# Altium PCB PCB_PLC.PcbDoc
Units mil, origin at the board's own origin, x right, y up, seen from the top; angles counter-clockwise.
Board outline 2559.06 x 3287.4 mil, 2 copper layers (Top Layer, Bottom Layer); 98 components, 70 nets, 312 pads, 24 vias.
Unrouted connection lines stored in the file: 207.
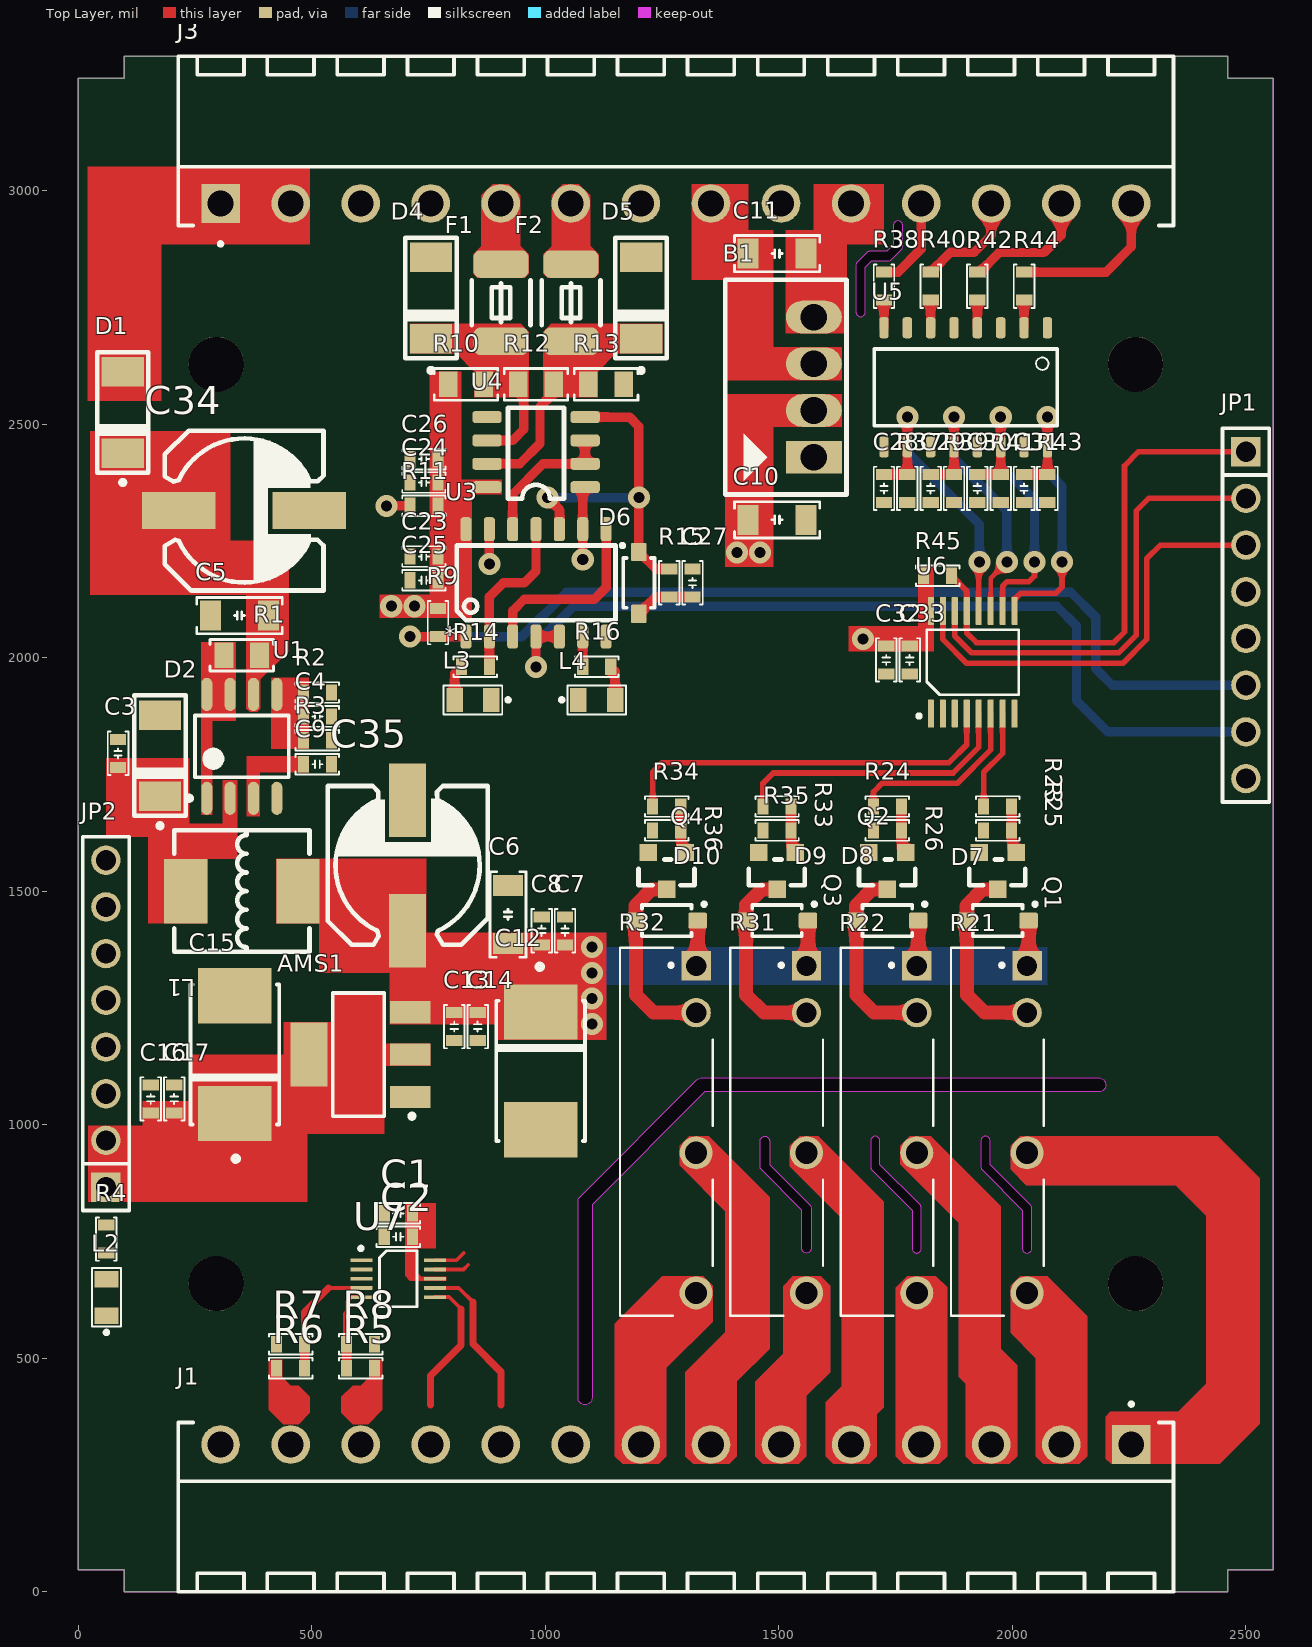
[diagram p0: Top Layer view]
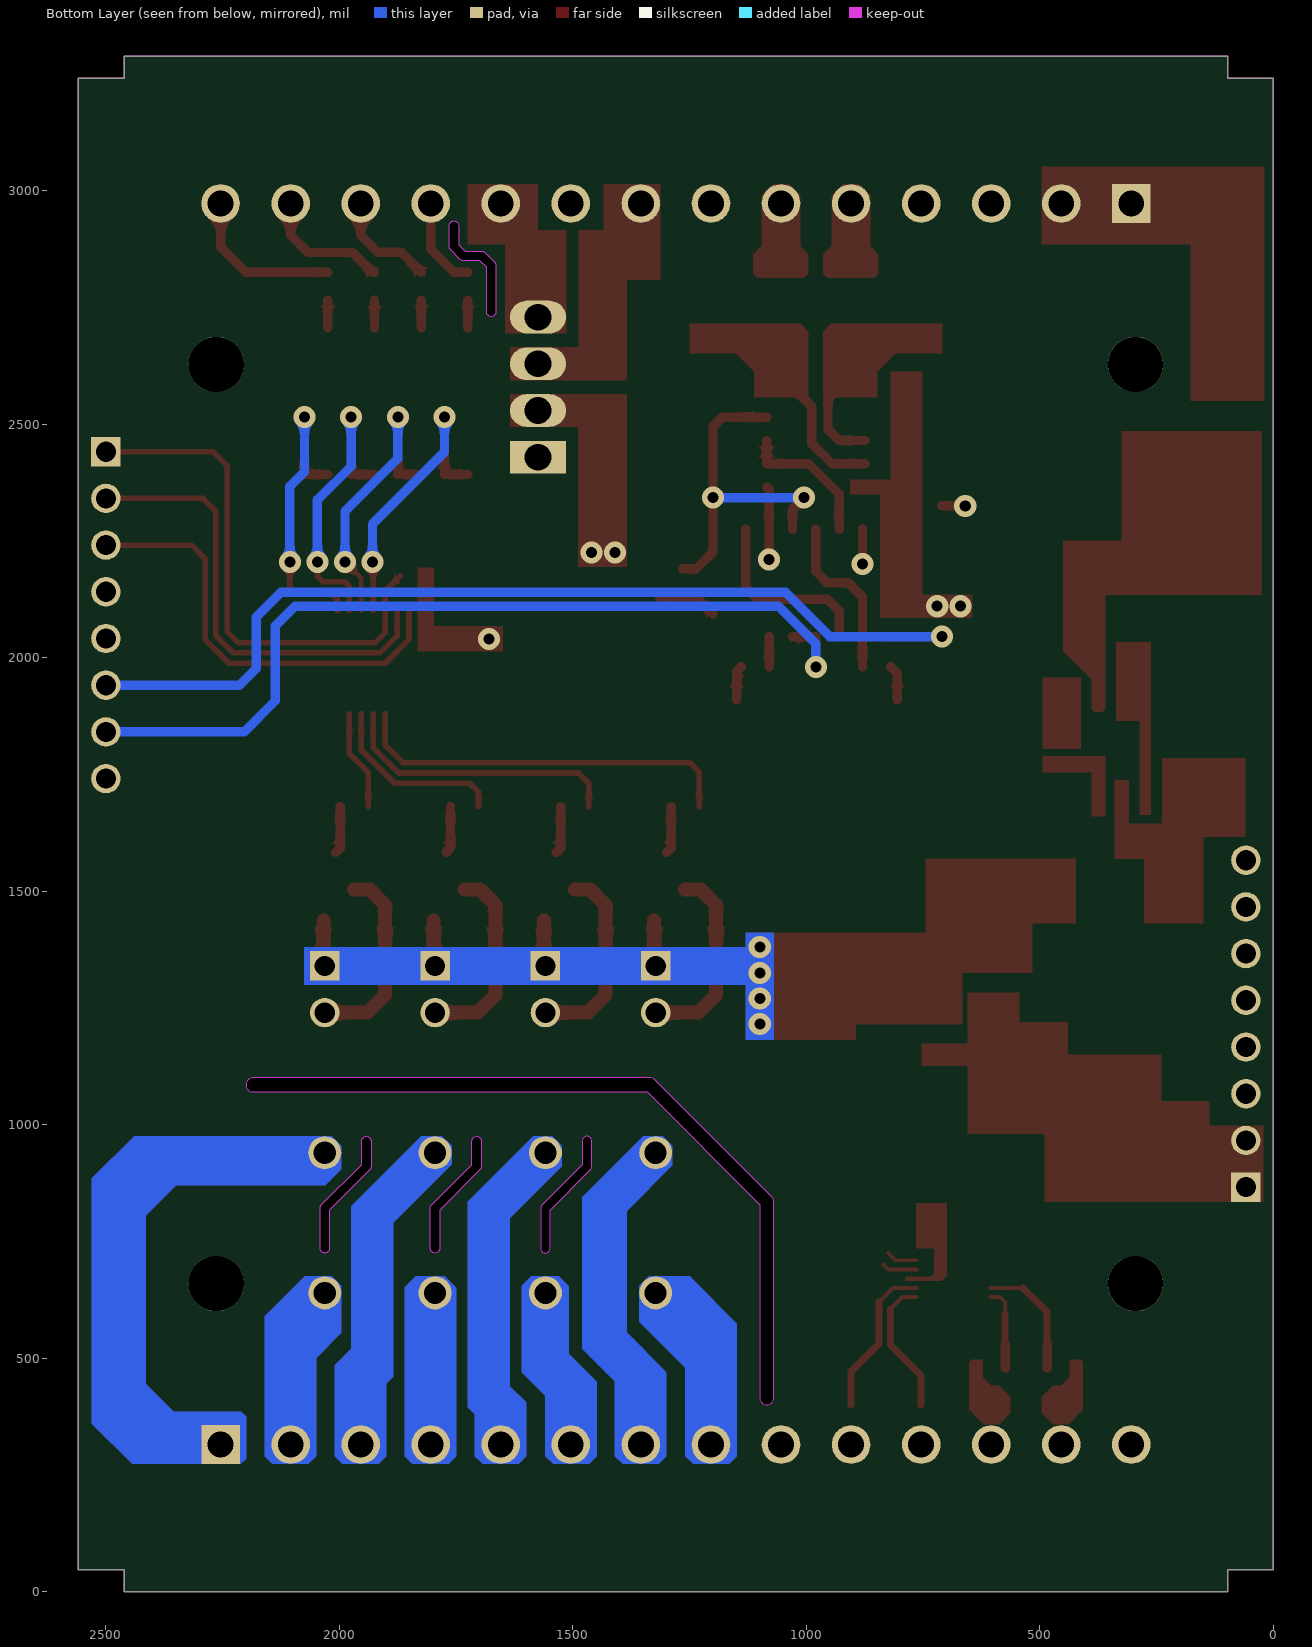
[diagram p1: Bottom Layer view, seen from below]
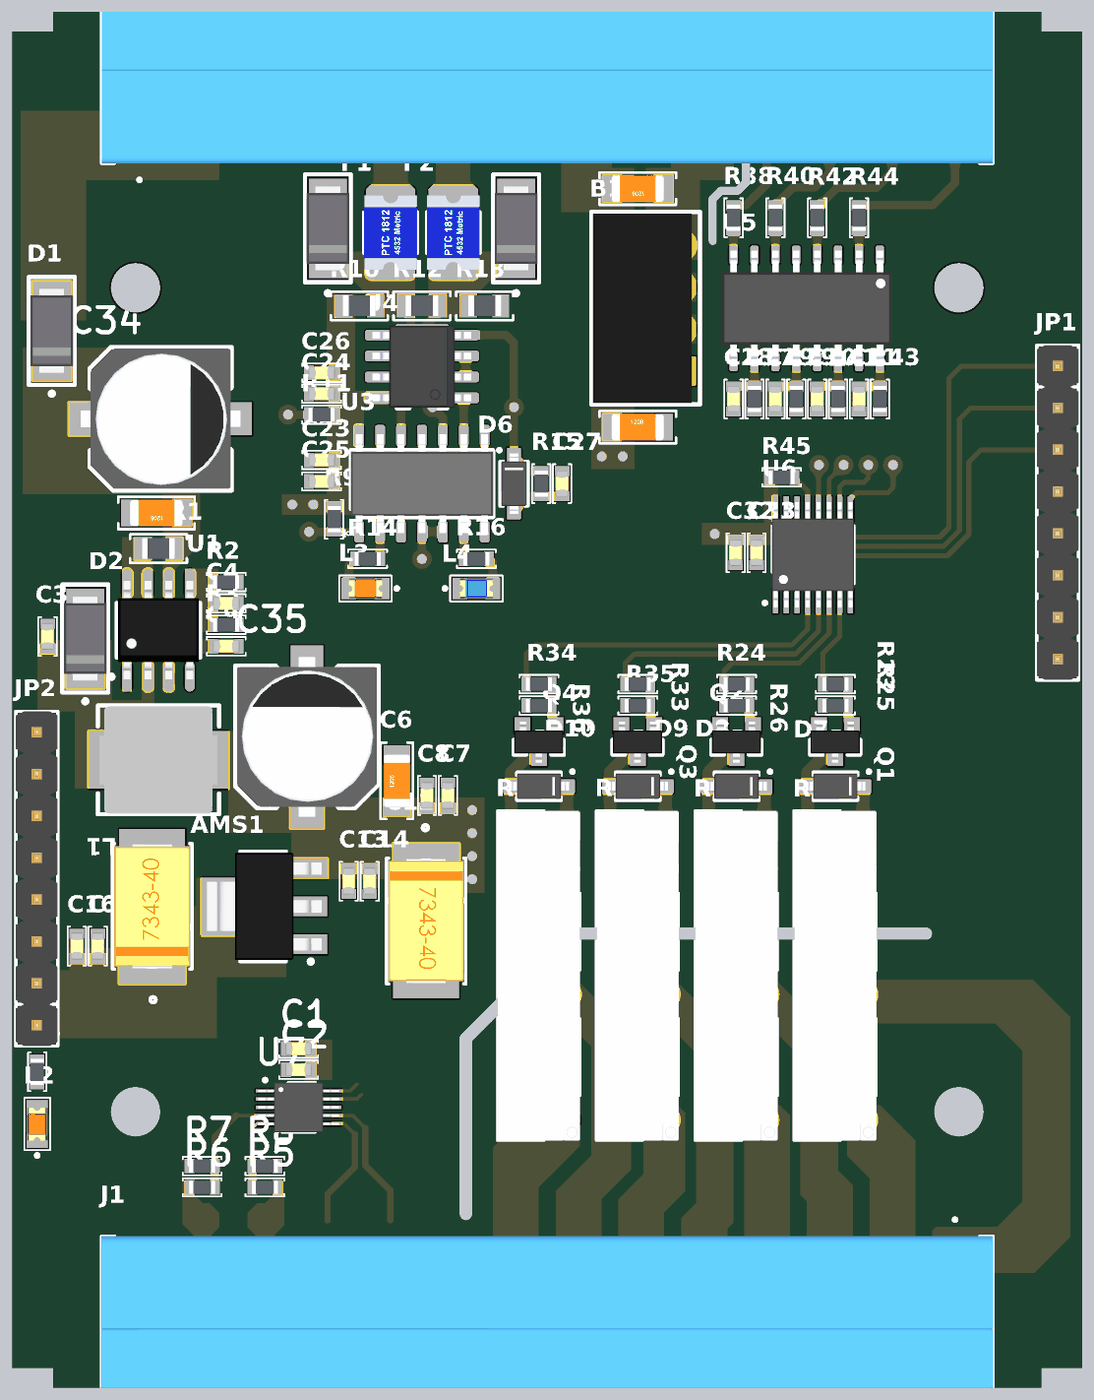
[diagram p2: 3D render of the assembled board from above, using the file's embedded part models]

## Layer stack, top to bottom
Top Solder: solder mask 0.4, Solder Resist, Dk 3.5
Top Layer: signal copper 1.4
Dielectric 1: dielectric 12.6, FR-4, Dk 4.8
Bottom Layer: signal copper 1.4
Bottom Solder: solder mask 0.4, Solder Resist, Dk 3.5

## Board outline
0,47.24 0,3240.16 98.43,3240.16 98.43,3287.4 2460.63,3287.4 2460.63,3240.16 2559.06,3240.16 2559.06,47.24 2460.63,47.24 2460.63,0 98.43,0 98.43,47.24
cut-out: 1664.98,2740 ccw(c1675,2740) 1685.02,2740 1685.02,2835.85 1699.15,2849.98 1735,2849.98 ccw(c1735,2860) 1742.08,2852.92 1762.08,2872.92 ccw(c1755,2880) 1765.02,2880 1765.02,2925 ccw(c1755,2925) 1744.98,2925 1744.98,2884.15 1730.85,2870.01 1695,2870.01 ccw(c1695,2860) 1687.92,2867.08 1667.92,2847.08 ccw(c1675,2840) 1664.98,2840
cut-out: 1069.98,415 1069.98,835 cw(c1085,835) 1074.4,845.63 1074.38,845.62 1324.38,1095.62 1324.37,1095.6 cw(c1335,1085) 1335,1100.01 2185,1100.01 cw(c2185,1085) 2200.02,1085 cw(c2185,1085) 2185,1069.98 1341.22,1069.98 1100.02,828.78 1100.02,415 cw(c1085,415)
cut-out: 1935.36,902.92 2021.48,816.8 2021.48,735 ccw(c2031.5,735) 2041.51,735 2041.51,820.94 ccw(c2031.5,820.94) 2038.58,828.03 1952.46,914.15 1952.46,965 ccw(c1942.44,965) 1932.43,965 1932.43,910 ccw(c1942.44,910)
cut-out: 1699.14,902.92 1785.26,816.8 1785.26,735 ccw(c1795.28,735) 1805.29,735 1805.29,820.94 ccw(c1795.28,820.94) 1802.36,828.03 1716.24,914.15 1716.24,965 ccw(c1706.22,965) 1696.21,965 1696.21,910 ccw(c1706.22,910)
cut-out: 1462.92,902.92 cw(c1470,910) 1459.98,910 1459.98,965 cw(c1470,965) 1480.02,965 1480.02,914.15 1566.14,828.03 cw(c1559.06,820.94) 1569.07,820.94 1569.07,735 cw(c1559.06,735) 1549.04,735 1549.04,816.8

## Design rules (kind name [scope] priority, off if disabled: settings)
Clearance [All] p1: gap=10 ignorepadtopadclearanceinfootprint=FALSE except(0: Arc-Hole Track-Hole SMDPad-Hole THPad-Hole Via-Hole Fill-Hole Poly-Hole Region-Hole Text-Hole)
PolygonConnect [All] p1: connectstyle=Relief reliefconductorwidth=10 reliefentries=4 polygonreliefangle="90 Angle" airgapwidth=10
RoutingVias [All] p1: holewidth=23.62 width=47.24 viastyle="Through Hole" minholewidth=23.62 minwidth=47.24 maxholewidth=23.62 maxwidth=47.24
SilkToSilkClearance [All] p1: silktosilkclearance=4
SilkToSolderMaskClearance [IsPad] p1: minsilkscreentomaskgap=4 clearancetoexposedcopper=TRUE
SolderMaskExpansion [All] p1: expansion=4 istentingtop=FALSE
Width [All] p1: maxlimit=100 minlimit=8 preferedwidth=10
28 further rules are at their usual default settings.

## Classes and differential pairs
component class U_RS485: C23 C24 C25 C26 C27 D4 D5 D6 F1 F2 L3 L4 R9 R10 R11 R12 R13 R14 R15 R16 U3 U4
component class U_Relay: D7 D8 D9 D10 Q1 Q2 Q3 Q4 R21 R22 R23 R24 R25 R26 R31 R32 R33 R34 R35 R36
component class U_Power: AMS1 B1 C3 C4 C5 C6 C7 C8 C9 C10 C11 C12 C13 C14 C15 C16 C17 C34 C35 D1 D2 L1 L2 R1 R2 R3 R4 U1
component class U_Input: C28 C29 C30 C31 R37 R38 R39 R40 R41 R42 R43 R44 U5
component class Top: C1 C2 C32 C33 J1 J3 JP1 JP2 R5 R6 R7 R8 R45 U6 U7

## Components (designator, comment, footprint, x,y, rotation, side; value= is the part's Value field where it differs from the comment)
AMS1 "AMS1117-3.3V" SOT223 600,1150 r90 top value="AMS1117-3.3V SOT223"
B1 "B0505S" B0505S 1574.8,2429.13 r90 top
C1 "1uF" "CAP 0603" 685,810 r180 top
C2 "0.1uF" "CAP 0603" 685,760 r180 top
C3 "470pF" "CAP 0603" 85,1795 r90 top
C4 "100pF" "CAP 0603" 511.81,1874.02 r180 top
C5 "10uF" "CAP 1206" 345,2090 r180 top
C6 "10uF" "CAP 1206" 920,1450 r90 top
C7 "1uF" "CAP 0603" 1042,1415 r90 top
C8 "0.1uF" "CAP 0603" 992,1415 r90 top
C9 "470pF" "CAP 0603" 511.81,1771.65 r0 top
C10 "10uF" "CAP 1206" 1496.06,2295 r0 top
C11 "10uF" "CAP 1206" 1496.06,2865 r180 top
C12 "100uF" "TU TANTALUM SMD7343" 990,1115 r270 top
C13 "1uF" "CAP 0603" 805,1210 r270 top
C14 "0.1uF" "CAP 0603" 855,1210 r270 top
C15 "100uF" "TU TANTALUM SMD7343" 335,1150 r90 top
C16 "1uF" "CAP 0603" 155,1055 r90 top
C17 "0.1uF" "CAP 0603" 205,1055 r90 top
C23 "1uF" "CAP 0603" 740,2216.54 r180 top
C24 "1uF" "CAP 0603" 740,2375 r180 top
C25 "0.1uF" "CAP 0603" 740,2165.35 r180 top
C26 "0.1uF" "CAP 0603" 740,2425 r180 top
C27 "33pF" "CAP 0603" 1315,2160 r270 top
C28 "0.1uF" "CAP 0603" 1725,2362.2 r270 top
C29 "0.1uF" "CAP 0603" 1825,2362.2 r270 top
C30 "0.1uF" "CAP 0603" 1925,2362.2 r270 top
C31 "0.1uF" "CAP 0603" 2025,2362.2 r270 top
C32 "1uF" "CAP 0603" 1730,1995 r270 top
C33 "0.1uF" "CAP 0603" 1780,1995 r270 top
C34 "470uF" "TU NHOM 8 (F)" 355,2315 r0 top
C35 "470uF" "TU NHOM 8 (F)" 705,1555 r90 top
D1 "SS34" "DIODE SMA" 95,2525 r270 top
D2 "SS34" "DIODE SMA" 175,1790 r270 top
D4 "SMAJ18A" DO-214AC,SMA 755,2770 r270 top
D5 "SMAJ18A" DO-214AC,SMA 1205,2770 r270 top
D6 "MBR0520" SOD-123 1200,2160 r90 top value=FR307
D7 "Didode_SMD" SOD-123 1968.5,1437.01 r0 top value=FR307
D8 "Didode_SMD" SOD-123 1732.28,1437.01 r0 top value=FR307
D9 "Didode_SMD" SOD-123 1496.06,1437.01 r0 top value=FR307
D10 "Didode_SMD" SOD-123 1259.84,1437.01 r0 top value=FR307
F1 "MSMF050" FUSE_PTC 905,2760 r90 top
F2 "MSMF050" FUSE_PTC 1055,2760 r90 top
J1 "CON 14 EDGR 3.81 RA" "CON 14 EDGR 3.81 RA" 1279.53,314.96 r180 top locked
J3 "CON 14 EDGR 3.81 RA" "CON 14 EDGR 3.81 RA" 1279.53,2972.44 r0 top locked
JP1 "JP 1x8 2.54" "JP 1x8 DT" 2500,2440.94 r270 top locked
JP2 "JP 1x8 2.54" "JP 1x8 DT" 59.06,866.14 r90 top locked
L1 "100uH/0630" INDUCTOR_0630SMD 350,1500 r90 top
L2 "LED 0805" LED-0805-RED 60,630 r270 top
L3 "LED 0805" LED-0805-RED 845,1909.45 r0 top
L4 "LED 0805" LED-0805-BLUE 1110,1909.45 r180 top
Q1 "2SC1815" SOT23 1968.5,1543.31 r180 top
Q2 "2SC1815" SOT23 1732.28,1543.31 r180 top
Q3 "2SC1815" SOT23 1496.06,1543.31 r180 top
Q4 "2SC1815" SOT23 1259.84,1543.31 r180 top
R1 "0.03" "RES 0805" 350,2005 r0 top
R2 "4.7k" "RES 0603" 511.81,1925.2 r0 top
R3 "1.5k" "RES 0603" 511.81,1822.83 r180 top
R4 "2.2k" "RES 0603" 60,755 r90 top
R5 "RS1" "RES 0603" 604.53,478.7 r0 top
R6 "RS1" "RES 0603" 454.53,478.7 r180 top
R7 "RS2" "RES 0603" 454.53,529.88 r180 top
R8 "RS2" "RES 0603" 604.53,529.88 r0 top
R9 "4.7k" "RES 0603" 770,2075 r90 top
R10 "560" "RES 0805" 830,2585 r180 top
R11 "4.7k" "RES 0603" 740,2325 r0 top
R12 "120" "RES 0805" 980,2585 r180 top
R13 "560" "RES 0805" 1130,2585 r180 top
R14 "2.2k" "RES 0603" 850,1980.31 r0 top
R15 "5.6k" "RES 0603" 1265,2160 r270 top
R16 "2.2k" "RES 0603" 1110,1980.31 r180 top
R21 "HF49FD/005" RELAY_HF49FD/005-1H12T 1968.5,984.25 r270 top locked
R22 "HF49FD/005" RELAY_HF49FD/005-1H12T 1732.28,984.25 r270 top locked
R23 "2.2k" "RES 0603" 1968.5,1681.1 r0 top
R24 "2.2k" "RES 0603" 1732.28,1681.1 r0 top
R25 "10k" "RES 0603" 1968.5,1629.92 r0 top
R26 "10k" "RES 0603" 1732.28,1629.92 r0 top
R31 "HF49FD/005" RELAY_HF49FD/005-1H12T 1496.06,984.25 r270 top locked
R32 "HF49FD/005" RELAY_HF49FD/005-1H12T 1259.84,984.25 r270 top locked
R33 "2.2k" "RES 0603" 1496.06,1681.1 r0 top
R34 "2.2k" "RES 0603" 1259.84,1681.1 r0 top
R35 "10k" "RES 0603" 1496.06,1629.92 r0 top
R36 "10k" "RES 0603" 1259.84,1629.92 r0 top
R37 "10k" "RES 0603" 1775,2362.2 r90 top
R38 "2.2k" "RES 0603" 1725,2795.28 r90 top
R39 "10k" "RES 0603" 1875,2362.2 r90 top
R40 "2.2k" "RES 0603" 1825,2795.28 r90 top
R41 "10k" "RES 0603" 1975,2362.2 r90 top
R42 "2.2k" "RES 0603" 1925,2795.28 r90 top
R43 "10k" "RES 0603" 2075,2362.2 r90 top
R44 "2.2k" "RES 0603" 2025,2795.28 r90 top
R45 "2.2k" "RES 0603" 1840,2175 r180 top
U1 "MC34063ABD-TR" "SOP 8" 350,1810 r90 top
U3 "74HC04D" SOIC14_50_285_80X25_SMT 980,2160 r90 top
U4 "SP3485" SOIC8_50_328_25X90_SMT 980,2440 r180 top
U5 "TLP291-4" SOP16_TLP2XX 1900,2578.74 r270 top
U6 "TCA9534APWR" SOP65P640X120-16N 1915,1990 r90 top
U7 "ADS1115IDGSR" SOP50P490X110-10N 685,670 r0 top

## Footprints (in the part's own frame and the unit in brackets; to place one, negate y for a bottom-side part, rotate by r counter-clockwise, add the part's x,y. Pads: shape width x height; smd on the part's side, far side on the other; paste and mask are expansions set on the pad)
B0505S [mil]
  rect 70x120 hole 57: 1(0,0)
  oval 70x120 hole 57: 2(100,0) 3(200,0) 4(300,0)
  silkscreen extent -80,-70 380,190, body extent -76,-50 376,186, height 394
"CAP 0603" [mm]
  rect 0.6x0.89 smd mask+0.051: 1(-0.762,0) 2(0.762,0)
  silkscreen extent -1.18,-0.56 1.18,0.56, body extent -0.8,-0.4 0.8,0.4, height 0.78
"CAP 1206" [mil]
  rect 45x64 smd mask+2: 1(-62,0) 2(62,0)
  silkscreen extent -91,-39 91,39, body extent -63,-31 63,32, height 40
"CON 14 EDGR 3.81 RA" [mm]
  rect 2.1x2.1 / inner round 2.1 / far side rect 2.1x2.1 hole 1.4: 1(-24.765,0)
  round 2.1 hole 1.4: 2(-20.955,0) 3(-17.145,0) 4(-13.335,0) 5(-9.525,0) 6(-5.715,0) 7(-1.905,0) 8(1.905,0) 9(5.715,0) 10(9.525,0) 11(13.335,0) 12(17.145,0) 13(20.955,0) 14(24.765,0)
  silkscreen extent -27.07,-2.3 27.07,8, body extent -27.06,-1.2 27.07,8, height 7.4
"DIODE SMA" [mil] "SMA"
  rect 62.99x90.55 smd: 1(-87,0) 2(87,0)
  silkscreen extent -129,-55 155,55, body extent -102,-51 102,51, height 95
DO-214AC,SMA [mil] "Didode [1N4007,SS14,...]"
  rect 62.99x90.55 smd: 1(-87,0) 2(87,0)
  silkscreen extent -129,-55 160,55, body extent -102,-51 102,51, height 95
FUSE_PTC [mm]
  rrect50% 1.5x3 smd: 1(-2.1,0) 2(2.1,0)
  silkscreen extent -1.24,-1.6 1.23,1.6, body extent -2.25,-1.6 2.25,1.6, height 0.55
INDUCTOR_0630SMD [mm] "10uH"
  rect 3.5x2.35 smd: 1(0,3.048) 2(0,-3.048)
  silkscreen extent -3.3,-3.68 3.3,3.68, body extent -3.25,-3.59 3.25,3.59, height 3.97
"JP 1x8 DT" [mm] "8 pins, 1 row, straight, gold plating"
  rect 1.6x1.6 hole 1.1: 1(0,0)
  round 1.6 hole 1.1: 2(2.54,0) 3(5.08,0) 4(7.62,0) 5(10.16,0) 6(12.7,0) 7(15.24,0) 8(17.78,0)
  silkscreen extent -1.27,-1.27 19.05,1.27, body extent -1.27,-1.27 19.05,1.27, height 8.54
LED-0805-BLUE [mm]
  rect 0.9x1.3 smd mask+0.051: 1(-1,0) 2(1,0)
  silkscreen extent -1.6,-0.79 1.98,0.79, body extent -1.01,-0.62 1.01,0.62, height 1.1
LED-0805-RED [mm]
  rect 0.9x1.3 smd mask+0.051: 1(-1,0) 2(1,0)
  silkscreen extent -1.6,-0.79 1.98,0.79, body extent -1.01,-0.62 1.01,0.63, height 1.1
RELAY_HF49FD/005-1H12T [mm]
  rect 1.6x1.6 hole 1.1: 1(-9.03,1.6)
  round 1.6 hole 1.1: 2(-6.49,1.6)
  round 1.8 hole 1.2: 3(1.13,1.6) 4(8.75,1.6)
  silkscreen extent -10.03,-2.54 10,2.5, body extent -10,-2.5 10,2.5, height 12.63
"RES 0603" [mm] "RES 0603"
  rect 0.6x0.89 smd mask+0.051: 1(-0.762,0) 2(0.762,0)
  silkscreen extent -1.18,-0.56 1.18,0.56, body extent -0.8,-0.4 0.8,0.4, height 0.45
"RES 0805" [mil]
  rect 40x55 smd mask+2: 1(-38,0) 2(38,0)
  silkscreen extent -68,-34 68,34, body extent -39,-25 39,25, height 20
SOD-123 [mm]
  rrect18% 1x0.85 smd: 1(-1.68,0) 2(1.68,0)
  silkscreen extent -1.35,-0.85 2.13,0.99, body extent -1.83,-0.78 1.82,0.77, height 1.44
SOIC8_50_328_25X90_SMT [mm] "SOIC"
  rrect50% 1.6x0.65 smd mask+0.076: 1(-2.667,1.905) 2(-2.667,0.635) 3(-2.667,-0.635) 4(-2.667,-1.905) 5(2.667,-1.905) 6(2.667,-0.635) 7(2.667,0.635) 8(2.667,1.905)
  silkscreen extent -1.52,-2.41 1.52,2.54, body extent -3.01,-2.5 3.01,2.5, height 1.75
SOIC14_50_285_80X25_SMT [mm] "SOIC, 14-Leads, Body 8.56x3.90mm, Pitch 1.27mm, IPC Medium Density"
  rrect50% 1.3x0.6 smd mask+0.076: 1(-2.921,3.81) 2(-2.921,2.54) 3(-2.921,1.27) 4(-2.921,0) 5(-2.921,-1.27) 6(-2.921,-2.54) 7(-2.921,-3.81) 8(2.921,-3.81) 9(2.921,-2.54) 10(2.921,-1.27) 11(2.921,0) 12(2.921,1.27) 13(2.921,2.54) 14(2.921,3.81)
  silkscreen extent -2.03,-4.32 2.03,4.32, body extent -3,-4.33 3,4.32, height 1.55
SOP16_TLP2XX [mil]
  rrect50% 45x20 smd: 1(-127.56,175) 2(-127.56,125) 3(-127.56,75) 4(-127.56,25) 5(-127.56,-25) 6(-127.56,-75) 7(-127.56,-125) 8(-127.56,-175) 9(127.56,-175) 10(127.56,-125) 11(127.56,-75) 12(127.56,-25) 13(127.56,25) 14(127.56,75) 15(127.56,125) 16(127.56,175)
  silkscreen extent -82,-196 82,196, body extent -138,-203 138,203, height 83
SOP50P490X110-10N [mm]
  rrect25% 1.2x0.2 smd: 1(-2,1) 2(-2,0.5) 3(-2,0) 4(-2,-0.5) 5(-2,-1) 6(2,-1) 7(2,-0.5) 8(2,0) 9(2,0.5) 10(2,1)
  silkscreen extent -2.13,-1.52 1.02,1.75, body extent -2.45,-1.5 2.45,1.5, height 1.1
SOP65P640X120-16N [mil]
  rrect25% 60x13 smd: 1(-110,89.57) 2(-110,63.98) 3(-110,38.39) 4(-110,12.8) 5(-110,-12.8) 6(-110,-38.39) 7(-110,-63.98) 8(-110,-89.57) 9(110,-89.57) 10(110,-63.98) 11(110,-38.39) 12(110,-12.8) 13(110,12.8) 14(110,38.39) 15(110,63.98) 16(110,89.57)
  silkscreen extent -119,-98 69,119, body extent -126,-98 126,98, height 47
"SOP 8" [mm] "SOIC, 8-Leads, Body 4.9x3.9mm, Pitch 1.27mm, IPC High Density"
  oval 1.8x0.6 smd: 1(-2.825,1.905) 2(-2.825,0.635) 3(-2.825,-0.635) 4(-2.825,-1.905) 5(2.825,-1.905) 6(2.825,-0.635) 7(2.825,0.635) 8(2.825,1.905)
  silkscreen extent -2.95,-2.55 1.68,2.98, body extent -2.99,-2.45 3,2.45, height 1.6
SOT23 [mm] "SOT23"
  rect 0.95x0.95 smd: 1(-1,-1) 2(1,-1) 3(0,1)
  silkscreen extent -1.51,-0.62 1.54,0.78, body extent -1.48,-1.23 1.52,1.27, height 1.05
SOT223 [mm]
  rect 1.2x2.2 smd: 1(-2.3,-2.8) 2(0,-2.8) 3(2.3,-2.8)
  rect 3.5x2 smd: 4(0,2.7)
  silkscreen extent -3.47,-3.03 3.35,1.4, body extent -3.25,-3.56 3.25,3.4, height 1.68
"TU NHOM 8 (F)" [mm]
  rect 4x2 smd: 1(-3.55,0) 2(3.55,0)
  silkscreen extent -4.32,-4.35 4.32,4.34, body extent -4.85,-4.25 4.85,4.25, height 10.5
"TU TANTALUM SMD7343" [mm]
  rect 3x4 smd: 1(-3.2,0) 2(3.2,0)
  silkscreen extent -5.82,-2.41 3.81,2.41, body extent -3.8,-2.3 3.8,2.3, height 3.99

## Part data
AMS1: library part "AMS1117 SMD", "Dán", Chung_Loai=Dán, Don_Vi=Con, Ma_Hang=MH000596
B1: "Cắm", Chung_Loai=Cắm, Don_Vi=Con, Ma_Hang=MH003143, Ten_Linh_Kien="B0505S-1W SIP4 IC Converter DC-DC"
C1 C2 C3 C4 C7 C8 C9 C13 C14 C16 C17 C23 C24 C25 C26 C27 C28 C29 C30 C31 C32 C33: library part "Cap 0603", "Capacitor SMD 0603"
C5 C6 C10 C11: library part "Cap 1206", "Capacitor SMD 1206"
C12 C15: library part "Tu tantalum 100uF 25V SMD7343", "Dán", Chung_Loai=Dán, Don_Vi=Con, Ma_Hang=MH002347, So_Chan=2, Ten_Linh_Kien="Tụ tantalum 107E-100uF 25V SMD7343"
C34 C35: library part "Tu Nhom 470uF 16V", "Dán", Chung_Loai=Dán, Don_Vi=Con, Ma_Hang=MH001940, So_Chan=2, Ten_Linh_Kien="Tụ Nhôm 470uF 16V 8x10.4MM"
D1 D2: library part "Diode SS34 ( 1N5822 )", "Dán", Chung_Loai=Dán, Don_Vi=Con, Ma_Hang=MH002104, Ten_Linh_Kien="Diode SS34 3A 40V SMA ( 1N5822 SS34A)"
D4 D5: library part Diode_TVS, "Zener Diode", LatestRevisionDate=17-Jul-2002, LatestRevisionNote="Re-released for DXP Platform.", PackageDescription="Diode, Thru-Hole; 2 Leads; 0.7 in Pin Spacing", PackageReference=DIODE-0.7, Published=8-Jun-2000, Publisher="Altium Limited"
D6: library part Didode_MBR0520, Current=3Amp, Code_JEDEC=DO-204-AH, ComponentLink1Description="Digikey Part Link", ComponentLink1URL=http://www.fairchildsemi.com/, ComponentLink2Description="Open Datasheet", ComponentLink2URL=H:\LIBRARY\LIBRARY.Datasheet\ds26003.pdf, DatasheetDocument=1997, LatestRevisionDate=17-Jul-2002, LatestRevisionNote="Re-released for DXP Platform.", PackageReference=DO-35, Published=8-Jun-2000, Publisher="Altium Limited", Vendor=Digikey
D7 D8 D9 D10: Current=3Amp, Code_JEDEC=DO-204-AH, ComponentLink1Description="Digikey Part Link", ComponentLink1URL=http://www.fairchildsemi.com/, ComponentLink2Description="Open Datasheet", ComponentLink2URL=H:\LIBRARY\LIBRARY.Datasheet\ds26003.pdf, DatasheetDocument=1997, LatestRevisionDate=17-Jul-2002, LatestRevisionNote="Re-released for DXP Platform.", PackageReference=DO-35, Published=8-Jun-2000, Publisher="Altium Limited", Vendor=Digikey
F1 F2: library part Fuse_smd
J1 J3: "Pluggable,Receptacle, Horizontal, 3.81 Pitch, Terminal Block Connector", Package=None, Availability=Unavailable, MF="{'manufacturer': u'Same Sky (Formerly CUI Devices)'}", MP=TBP02R1-381-14BE, Price=None
JP1 JP2: library part "JP 1x8 2.54 Duc Thang", "Cắm", Chung_Loai=Cắm, Don_Vi=Con, Ma_Hang=MH000903, Ten_Linh_Kien="Jump Đơn Đực 2.54MM 1x40P Thẳng 11MM"
L1: library part "Inductor Ferrite", "Smd Inductors", Code_IEC=1005, Code_JEITA=0402, ComponentLink1Description="Digikey Part Link", ComponentLink2Description="Open Datasheet", ComponentLink2URL=H:\LIBRARY\LIBRARY.Datasheet\, LatestRevisionDate=17-Jul-2002, LatestRevisionNote="Re-released for DXP Platform.", PackageReference=0402-A, Published=8-Jun-2000, Publisher="Altium Limited", Vendor=Digikey
L2 L3: library part "LED 0805 Do", "Dán", Chung_Loai=Dán, Don_Vi=Con, Ma_Hang=MH000897, Ten_Linh_Kien="LED 0805 Màu Đỏ (Red)"
L4: library part "LED 0805 Xanh Duong", "Dán", Chung_Loai=Dán, Don_Vi=Con, Ma_Hang=MH002327, Ten_Linh_Kien="LED 0805 Màu Xanh Dương (Blue)"
Q1 Q2 Q3 Q4: library part NPN_SMD, "SMD TRANSISTOR"
R1 R10 R12 R13: library part "RES 0805", "RES SMD 0805", Manufacturer="Vishay Dale", Manufacturer Part Number=CRCW040210K0FKED, Operating Temperature="-55°C ~ 155°C", Package / Case="0402 (1005 Metric)", Power (Watts)="0.063W, 1/16W", Resistance (Ohms)=10k, Supplier Part Number 1=541-10.0KLCT-ND, Temperature Coefficient=±100ppm/°C, Tolerance=±1%, Category=Resistors, ComponentLink1Description=http://www.vishay.com/docs/20035/dcrcwe3.pdf, ComponentLink1URL=http://www.vishay.com/docs/20035/dcrcwe3.pdf, Composition="Thick Film", Features="Automotive AEC-Q200", Height="0.016\" (0.40mm)", Number of Terminations=2, Packaging="Cut Tape (CT)", Pricing 1="10=0.083, 50=0.0444, 200=0.0255, 1000=0.0174 (USD)", RoHS="RoHS Compliant", Size / Dimension="0.039\" L x 0.020\" W (1.00mm x 0.50mm)", Stock 1=2392462, Supplier 1=Digi-Key, Supplier Device Package="0402 (1005 Metric)"
R2 R3 R4 R5 R6 R7 R8 R9 R11 R14 R15 R16 R23 R24 R33 R34 R38 R40 R42 R44 R45: library part "RES 0603", "RES SMD 0603", Manufacturer="Vishay Dale", Manufacturer Part Number=CRCW040210K0FKED, Operating Temperature="-55°C ~ 155°C", Package / Case="0402 (1005 Metric)", Power (Watts)="0.063W, 1/16W", Resistance (Ohms)=10k, Supplier Part Number 1=541-10.0KLCT-ND, Temperature Coefficient=±100ppm/°C, Tolerance=±1%, Category=Resistors, ComponentLink1Description=http://www.vishay.com/docs/20035/dcrcwe3.pdf, ComponentLink1URL=http://www.vishay.com/docs/20035/dcrcwe3.pdf, Composition="Thick Film", Features="Automotive AEC-Q200", Height="0.016\" (0.40mm)", Number of Terminations=2, Packaging="Cut Tape (CT)", Pricing 1="10=0.083, 50=0.0444, 200=0.0255, 1000=0.0174 (USD)", RoHS="RoHS Compliant", Size / Dimension="0.039\" L x 0.020\" W (1.00mm x 0.50mm)", Stock 1=2392462, Supplier 1=Digi-Key, Supplier Device Package="0402 (1005 Metric)"
R21 R22 R31 R32: library part "Relay HF49FD", "Relay: electromagnetic; SPST-NO; Ucoil: 5VDC; 5A/250VAC; 5A/30VDC"
R25 R26 R35 R36 R37 R39 R41 R43: library part "RES 0603", "RES SMD 0603", Manufacturer="Vishay Dale", Manufacturer Part Number=CRCW040210K0FKED, Operating Temperature="-55°C ~ 155°C", Package / Case="0402 (1005 Metric)", Power (Watts)="0.063W, 1/16W", Supplier Part Number 1=541-10.0KLCT-ND, Temperature Coefficient=±100ppm/°C, Tolerance=±1%, Category=Resistors, ComponentLink1Description=http://www.vishay.com/docs/20035/dcrcwe3.pdf, ComponentLink1URL=http://www.vishay.com/docs/20035/dcrcwe3.pdf, Composition="Thick Film", Features="Automotive AEC-Q200", Height="0.016\" (0.40mm)", Number of Terminations=2, Packaging="Cut Tape (CT)", Pricing 1="10=0.083, 50=0.0444, 200=0.0255, 1000=0.0174 (USD)", Resistance (Ohms)=10k, RoHS="RoHS Compliant", Size / Dimension="0.039\" L x 0.020\" W (1.00mm x 0.50mm)", Stock 1=2392462, Supplier 1=Digi-Key, Supplier Device Package="0402 (1005 Metric)"
U1: "Buck, Boost Switching Regulator IC Positive or Negative Adjustable 1.25V 1 Output 1.5A (Switch) 8-SOIC (0.154, 3.90mm Width)", Package=None, Check_prices=https://www.snapeda.com/parts/MC34063ABD-TR/STMicroelectronics/view-part/?ref=eda, MF=STMicroelectronics, MP=MC34063ABD-TR, SnapEDA_Link=https://www.snapeda.com/parts/MC34063ABD-TR/STMicroelectronics/view-part/?ref=snap
U3: "Hex Inverter, SOIC14", Manufacturer_Name="Toshiba Electronic Devices & Storage Corp.", Copyright="Copyright (C) 2025 Ultra Librarian. All rights reserved.", Manufacturer_Part_Number=74HC04D, RefDes=RefDes, Type=Type
U5: library part "OPTO TLP291-4", "Optoisolator Transistor Output 2500Vrms 4 Channel 16-SOP", Package="SOP-16 Toshiba", Check_prices=https://www.snapeda.com/parts/TLP%20280-4/Toshiba/view-part/?ref=eda, MF="Toshiba Semiconductor", MP="TLP 280-4", SnapEDA_Link=https://www.snapeda.com/parts/TLP%20280-4/Toshiba/view-part/?ref=snap
U6: "8-bit 1.65- to 5.5-V I2C/SMBus I/O expander with interrupt, & config registers", Package="TSSOP-16 Texas Instruments", Check_prices=https://www.snapeda.com/parts/TCA9534APWR/Texas+Instruments/view-part/?ref=eda, MF="Texas Instruments", MP=TCA9534APWR, SnapEDA_Link=https://www.snapeda.com/parts/TCA9534APWR/Texas+Instruments/view-part/?ref=snap
U7: "16-bit, 860-SPS, 4-channel, delta-sigma ADC with PGA, oscillator, VREF, comparator and I2C", Package="VSSOP-10 Texas Instruments", Check_prices=https://www.snapeda.com/parts/ADS1115IDGSR/Texas+Instruments/view-part/?ref=eda, MF="Texas Instruments", MP=ADS1115IDGSR, SnapEDA_Link=https://www.snapeda.com/parts/ADS1115IDGSR/Texas+Instruments/view-part/?ref=snap

## Free pads (board coordinates)
  round 118.11 hole 118.11 unplated mask+0: 1(295.28,659.45) 1(2263.78,659.45)
  round 118.11 hole 118.11 unplated mask+4: 1(295.28,2627.95) 1(2263.78,2627.95)

## Via types
v1: diameter 47.24, hole 23.62, Top Layer to Bottom Layer, tented both sides, 24 vias

## Nets (pads, with @x,y where several pads share a name; then routed paths per layer and width w, separated by ;. In a path a pad name is that pad's centre, name@x,y a point inside that pad or via, vN(x,y) a via of type N, cw(c..) or ccw(c..) an arc to the next point about the centre after c; other vN are vias at no path point)
1Y_4Y: U3.3 U3.8 | length 400.7
  Top Layer w20: U3.3 930,2100 955,2125 1105,2125 1130,2150 U3.8
1Y_5A: R14.2 U3.2 U3.11 | length 362.5
  Top Layer w20: R14.2 U3.2 880,2130 910,2160 955,2160 980,2185 U3.11
3Y: R16.2 U3.6 | length 64.7
  Top Layer w20: R16.2 U3.6
5V: AMS1.3 B1.2 C4.1 C6.1 C7.1 C8.1 C10.1 C12.1 C13.1 C14.1 C35.1 D7.2 D8.2 D9.2 D10.2 L1.2 R2.2 R21.1 R22.1 R31.1 R32.1 | length 394.2
  Top Layer w30: R32.1 1325.98,1342.91 D10.2 ; R31.1 1562.2,1342.91 D9.2 ; R22.1 1798.43,1342.91 D8.2 ; R21.1 2034.65,1342.91 D7.2
  other v1: 1100,1215 1100,1270 1100,1325 1100,1380 1410,2225 1460,2225
5V_ISO: B1.4 C11.1 J3.10 U5.1 U5.3 U5.5 U5.7
6A: C27.2 D6.1 R15.2 U3.13 | length 205
  Top Layer w20: v1(880,2200) U3.13 ; D6.1 1236.14,2130 R15.2 C27.2
+3.3V: AMS1.2 AMS1.4 C1.1 C2.1 C15.1 C16.1 C17.1 C23.1 C24.1 C25.1 C26.1 C32.1 C33.1 JP2.1 JP2.2 R4.2 R9.2 R10.2 R11.2 R37.1 R39.1 R41.1 R43.1 R45.2 U3.14 U4.8 U6.16 U7.8
  other v1: 1680,2040 670,2110 720,2110
A: F1.2 J3.5
ADDR: JP1.4 U7.1
AI0: R6.1 R7.1 U7.4 | length 263.2
  Top Layer w8: 536,650.31 U7.4
  Top Layer w15: R7.1 484.53,598.84 536,650.31
  Top Layer w20: R6.1 R7.1
AI1: R5.1 R8.1 U7.5 | length 177.4
  Top Layer w8: 574.53,594.53 574.53,619.99 585.17,630.63 U7.5
  Top Layer w15: R8.1 574.53,594.53
  Top Layer w20: R5.1 R8.1
AI2: J1.11 U7.6 | length 298.8
  Top Layer w8: U7.6 794.37,630.63 819.77,605.23
  Top Layer w15: 754.53,399.96 754.53,462.67 819.77,527.91 819.77,605.23
AI3: J1.10 U7.7 | length 338.5
  Top Layer w8: U7.7 814.69,650.31 844.77,620.23
  Top Layer w15: 844.77,620.23 844.77,530.67 904.53,470.91 904.53,399.96
B: F2.2 J3.6
D: D6.2 R15.1 U3.10 U4.4 | length 745
  Top Layer w20: v1(1005,2342.52) 1030,2317.52 U3.10 ; U4.4 1180,2515 1200,2495 v1(1200,2342.52) D6.2 1236.14,2190 R15.1
  Bottom Layer w20: v1(1005,2342.52) v1(1200,2342.52)
DC_IN: D1.1 J3.1 J3.2
GND: AMS1.1 B1.1 C1.2 C2.2 C3.2 C5.2 C6.2 C7.2 C8.2 C9.2 C10.2 C12.2 C13.2 C14.2 C15.2 C16.2 C17.2 C23.2 C24.2 C25.2 C26.2 C27.1 C28.2 C29.2 C30.2 C31.2 C32.2 C33.2 C34.2 C35.2 D2.1 D4.1 D5.1 J3.3 J3.4 JP1.8 JP2.8 L2.2 L3.2 L4.2 Q1.2 Q2.2 Q3.2 Q4.2 R3.1 R7.2 R8.2 R13.1 R25.1 R26.1 R35.1 R36.1 U1.4 U3.7 U4.5 U5.9 U5.11 U5.13 U5.15 U6.1 U6.2 U6.3 U6.8 U7.3
GND_ISO: B1.3 C11.2 J3.8
IN1: J3.11 R38.2 | length 197.7
  Top Layer w20: R38.2 1755.02,2825.28 1804.53,2874.78 J3.11
IN2: J3.12 R40.2 | length 230.4
  Top Layer w20: R40.2 1867.54,2867.81 1918.07,2867.81 1954.53,2904.27 J3.12
IN3: J3.13 R42.2 | length 280.3
  Top Layer w20: R42.2 1929.98,2825.28 1971.99,2867.29 2067.4,2867.29 2104.53,2904.41 J3.13
IN4: J3.14 R44.2 | length 344.9
  Top Layer w20: R44.2 2200.28,2825.28 2254.53,2879.53 J3.14
INT: JP1.1 R45.1 U6.13 | length 1119.6
  Top Layer w12: R45.1 1902.2,2142.8 U6.13 1902.2,2052.8 1923,2032 2217,2032 2240,2055 2240,2410.53 2270.41,2440.94 JP1.1
NetC3_1: C3.1 D2.2 L1.1 U1.2
NetC4_2: C4.2 R2.1 R3.2 U1.5
NetC5_1: C5.1 C34.1 D1.2 R1.2 U1.6
NetC9_1: C9.1 U1.3
NetD4_2: D4.2 F1.1 R10.1 R12.2 U4.6 | length 189.8
  Top Layer w20: U4.6 930,2465 953.86,2488.86 953.86,2573.14 R12.2
NetD5_2: D5.2 F2.1 R12.1 R13.2 U4.7 | length 270.2
  Top Layer w20: U4.7 945,2415 988.57,2458.57 988.57,2537.36 1018,2566.79 R12.1
NetD7_1: D7.1 Q1.3 R21.2 | length 417.6
  Top Layer w30: Q1.3 1935.85,1503.94 1902.36,1470.45 D7.1 1902.36,1277.64 1940.24,1239.76 R21.2
NetD8_1: D8.1 Q2.3 R22.2 | length 417.6
  Top Layer w30: Q2.3 1699.63,1503.94 1666.14,1470.45 D8.1 1666.14,1277.64 1704.02,1239.76 R22.2
NetD9_1: D9.1 Q3.3 R31.2 | length 417.6
  Top Layer w30: Q3.3 1463.41,1503.94 1429.92,1470.45 D9.1 1429.92,1277.64 1467.8,1239.76 R31.2
NetD10_1: D10.1 Q4.3 R32.2 | length 417.6
  Top Layer w30: Q4.3 1227.19,1503.94 1193.7,1470.45 D10.1 1193.7,1277.64 1231.57,1239.76 R32.2
NetJ1_12: J1.12 R5.2
NetJ1_13: J1.13 R6.2
NetL2_1: L2.1 R4.1
NetL3_1: L3.1 R14.1 | length 76.8
  Top Layer w20: L3.1 805.63,1965.94 R14.1
NetL4_1: L4.1 R16.1 | length 74.7
  Top Layer w20: R16.1 1149.37,1970.94 L4.1
NetQ1_1: Q1.1 R23.2 R25.2 | length 102.3
  Top Layer w20: R23.2 R25.2 1998.5,1592.05 Q1.1
NetQ2_1: Q2.1 R24.2 R26.2 | length 102.3
  Top Layer w20: R24.2 R26.2 1762.28,1592.05 Q2.1
NetQ3_1: Q3.1 R33.2 R35.2 | length 102.3
  Top Layer w20: R33.2 R35.2 1526.06,1592.05 Q3.1
NetQ4_1: Q4.1 R34.2 R36.2 | length 102.3
  Top Layer w20: R34.2 R36.2 1289.84,1592.05 Q4.1
NetR1_1: R1.1 U1.1 U1.7 U1.8
NetR38_1: R38.1 U5.8 | length 59
  Top Layer w20: U5.8 R38.1
NetR40_1: R40.1 U5.6 | length 59
  Top Layer w20: U5.6 R40.1
NetR42_1: R42.1 U5.4 | length 59
  Top Layer w20: U5.4 R42.1
NetR44_1: R44.1 U5.2 | length 59
  Top Layer w20: U5.2 R44.1
O1: C28.1 R37.2 U5.10 U6.12 | length 652.2
  Top Layer w12: U6.12 1927.8,2203.39 v1(1929.13,2204.72)
  Top Layer w20: C28.1 R37.2 U5.10 v1(1775,2515)
  Bottom Layer w20: v1(1775,2515) 1775,2440 1929.13,2285.87 v1(1929.13,2204.72)
O2: C29.1 R39.2 U5.12 U6.11 | length 649.1
  Top Layer w10: U6.11 1953.39,2169.92 v1(1988.19,2204.72)
  Top Layer w20: C29.1 R39.2 U5.12 v1(1875,2515)
  Bottom Layer w20: v1(1875,2515) 1875,2426.5 1988.19,2313.31 v1(1988.19,2204.72)
O3: C30.1 R41.2 U5.14 U6.10 | length 673.3
  Top Layer w12: U6.10 1978.98,2152.9 1988.76,2162.68 2035.31,2162.68 2047.24,2174.62 v1(2047.24,2204.72)
  Top Layer w20: C30.1 R41.2 U5.14 v1(1975,2515)
  Bottom Layer w20: v1(1975,2515) 1975,2410 2047.24,2337.76 v1(2047.24,2204.72)
O4: C31.1 R43.2 U5.16 U6.9 | length 686.9
  Top Layer w12: U6.9 2004.57,2124.57 2018.03,2138.03 2093.06,2138.03 2106.3,2151.27 v1(2106.3,2204.72)
  Top Layer w20: C31.1 R43.2 U5.16 v1(2075,2515)
  Bottom Layer w20: v1(2075,2515) 2075,2397.91 2106.3,2366.61 v1(2106.3,2204.72)
R: R11.1 U3.9 U4.1 | length 207.1
  Top Layer w20: v1(660,2325) R11.1 ; v1(1080,2210) U3.9 1080,2360 U4.1
RDY: JP1.5 U7.2
RE/DE: U3.12 U4.2 U4.3 | length 306.9
  Top Layer w20: U3.12 930,2350 995,2415 U4.2 U4.3
RL1: R23.1 U6.7 | length 215.7
  Top Layer w12: R23.1 1938.5,1754.49 1978.98,1794.96 U6.7
RL1_IN: J1.1 R21.3
RL1_OUT: J1.2 R21.4
RL2: R24.1 U6.6 | length 397.3
  Top Layer w12: R24.1 1702.28,1712.28 1721,1731 1882.11,1731 1953.39,1802.27 U6.6
RL2_IN: J1.3 R22.3
RL2_OUT: J1.4 R22.4
RL3: R33.1 U6.5 | length 615.7
  Top Layer w12: R33.1 1466.06,1731.06 1488,1753 1873,1753 1927.8,1807.8 U6.5
RL3_IN: J1.5 R31.3
RL3_OUT: J1.6 R31.4
RL4: R34.1 U6.4 | length 837
  Top Layer w12: R34.1 1229.84,1754.84 1250,1775 1863.89,1775 1902.2,1813.32 U6.4
RL4_IN: J1.7 R32.3
RL4_OUT: J1.8 R32.4
RXD: JP1.7 U3.4 U3.5 | length 1923.3
  Top Layer w20: v1(980,1980) U3.4 U3.5
  Bottom Layer w20: v1(980,1980) 980,2030 1060,2110 2095,2110 2137.35,2067.65 2137.35,1907.65 2204.06,1840.94 2344.06,1840.94 JP1.7
SCL: JP1.2 U6.14 U7.10 | length 1053.1
  Top Layer w8: U7.10 809.37,709.37 825,725
  Top Layer w12: U6.14 1876.61,2046.31 1912.92,2010 2227.47,2010 2265,2047.53 2265,2314.15 2291.8,2340.94 JP1.2
SDA: JP1.3 U6.15 U7.9 | length 1012.5
  Top Layer w8: U7.9 824.69,689.68 835,700
  Top Layer w12: U6.15 1851.02,2038.98 1902,1988 2236.59,1988 2287.56,2038.98 2287.56,2211.61 2316.9,2240.94 JP1.3
TXD: JP1.6 R9.1 U3.1 | length 2096.2
  Top Layer w20: v1(710,2045) R9.1 U3.1
  Bottom Layer w20: v1(710,2045) 950,2045 1045,2140 2125,2140 2178.2,2086.8 2178.2,1976.8 2214.06,1940.94 2294.06,1940.94 JP1.6
pads on no net: J1.9 J1.14 J3.7 J3.9 JP2.3 JP2.4 JP2.5 JP2.6 JP2.7

## Keep-outs
Keep-Out Layer:
  the board outline again, w0.5

## Other copper
Top Layer:
  region net +3.3V: 1650,2013.19 1650,2067.04 1798.19,2067.04 1798.19,2192.52 1831.93,2192.52 1831.93,2013.19 1797.52,2013.19
  region net +3.3V: 655.12,980.51 490,980.51 490,834.65 21.58,834.65 21.58,997.64 137.48,997.64 137.48,1050 240,1050 240,1150 440,1150 440,1218.9 544.88,1218.9 544.88,1281.89 655.12,1281.89 655.12,1173.62 753.54,1173.62 753.54,1126.38 655.12,1126.38
  region net +3.3V: 726.81,832 765,832 765,735 726.81,735 726.81,681.5 734.38,673.94 787.36,673.94 787.36,666.06 710,666.06 699.61,676.46 699.61,832
  region net NetJ1_12: 622.72,496.22 646.34,496.22 651.03,491.53 651.03,389.07 620.58,358.62 587.4,358.62 563.19,382.84 563.19,417.08 587.4,441.3 604.53,441.3 622.72,459.49 622.72,461.18
  region net NetJ1_13: 436.34,496.22 412.72,496.22 408.03,491.53 408.03,389.07 438.48,358.62 471.65,358.62 495.87,382.84 495.87,417.08 471.65,441.3 454.53,441.3 436.34,459.49 436.34,461.18
  region net GND_ISO: 1434.06,2915 1434.06,3013.78 1313.19,3013.78 1313.19,2809.13 1384.8,2809.13 1384.8,2594.13 1634.8,2594.13 1634.8,2664.13 1487.4,2664.13 1487.4,2915
  region net 5V: 1488.35,2494.13 1634.8,2494.13 1634.8,2564.13 1384.8,2564.13 1384.8,2195 1488.35,2195
  region net +3.3V: 645,2084.83 645,2135 752.48,2135 752.48,2612.5 820,2612.5 820,2381.25 906.5,2381.25 906.5,2350.2 841.81,2350.2 841.81,2084.83
  region net 5V: 1130,1181.93 895,1181.93 895,1215 666.93,1215 666.93,1325 516.26,1325 516.26,1431.1 423.74,1431.1 423.74,1568.9 744.37,1568.9 744.37,1410.5 1130,1410.5
  region net NetC3_1: 309.61,1643.7 237.8,1643.7 237.8,1785 60,1785 60,1616.14 150,1616.14 150,1431.1 276.26,1431.1 276.26,1568.9 339.9,1568.9 339.9,1737.42 309.61,1737.42
  region net NetC9_1: 493.62,1789.17 360.1,1789.17 360.1,1660.41 388.91,1660.41 388.91,1754.13 493.62,1754.13
  region net NetC4_2: 493.62,1956.65 493.62,1805.31 413.19,1805.31 413.19,1956.65
  region net NetR1_1: 263.19,2032.5 263.19,1663.35 286.81,1663.35 286.81,1865 336.81,1865 336.81,2032.5
  region net NetC5_1: 25,2134.63 360,2134.63 360,1977.5 360,1890.55 366.69,1883.86 382.72,1883.86 389.49,1890.63 389.49,1953.49 450,2014 450,2250 325,2250 325,2485 25,2485
  region net DC_IN: 20,2550 177.19,2550 177.19,2885 495.87,2885 495.87,3051.18 20,3051.18
  region net RL1_IN: 2439.8,975.2 2530,885 2530,360 2443.62,273.62 2211.38,273.62 2200,285 2200,375 2210,385 2355,385 2415,445 2415,805 2350,870 2030,870 1996.06,903.94 1996.06,954.44 2016.82,975.2
  region net RL1_OUT: 2160,590 2074.8,675.2 2016.82,675.2 1996.06,654.44 1996.06,553.94 2050,500 2050,290 2066.38,273.62 2143.62,273.62 2160,290
  region net RL2_IN: 2010,485 1975,520 1975,825 1824.8,975.2 1780.6,975.2 1759.84,954.44 1759.84,915.16 1885,790 1885,460 1900,445 1900,290 1916.38,273.62 1993.62,273.62 2010,290
  region net RL2_OUT: 1860,651.51 1836.31,675.2 1774.68,675.2 1750,650.52 1750,290 1766.38,273.62 1843.62,273.62 1860,290
  region net RL3_IN: 1600,405 1635,440 1635,800 1523.62,911.38 1523.62,954.44 1544.38,975.2 1584.8,975.2 1725,835 1725,395 1710,380 1710,290 1693.62,273.62 1616.38,273.62 1600,290
  region net RL3_OUT: 1544.46,675.2 1530.2,675.2 1509.06,654.05 1509.06,509.53 1449.06,449.53 1449.06,290 1465.43,273.62 1542.68,273.62 1559.06,290 1559.06,419.06 1610,470 1610,655 1589.8,675.2
  region net RL4_IN: 1300,470 1385,555 1385,815 1287.4,912.6 1287.4,954.44 1308.16,975.2 1349.8,975.2 1480,845 1480,520 1410,450 1410,290 1393.62,273.62 1316.38,273.62 1300,290
  region net RL4_OUT: 1358.27,578.27 1358.27,654.44 1337.51,675.2 1250.2,675.2 1149.06,574.06 1149.06,290 1165.43,273.62 1242.68,273.62 1259.06,290 1259.06,479.06
  region net B: 995.94,2863.56 1013.19,2880.8 1013.19,2989.56 1037.4,3013.78 1071.65,3013.78 1095.87,2989.56 1095.87,2881.75 1114.06,2863.56 1114.06,2821.8 1105.41,2813.15 1004.59,2813.15 995.94,2821.8
  region net NetD5_2: 1250.28,2651.5 1151,2651.5 1112,2612.5 1112,2557.5 995.94,2557.5 995.94,2698.2 1012.24,2714.5 1250.28,2714.5
  region net A: 845.94,2863.56 863.19,2880.8 863.19,2989.56 887.4,3013.78 921.65,3013.78 945.87,2989.56 945.87,2881.75 964.06,2863.56 964.06,2821.8 955.41,2813.15 854.59,2813.15 845.94,2821.8
  region net NetD4_2: 709.73,2651.5 809,2651.5 848,2612.5 848,2557.5 964.06,2557.5 964.06,2698.2 947.76,2714.5 709.73,2714.5
  region net 5V_ISO: 1644.8,2885 1725,2885 1725,3013.78 1575,3013.78 1575,2915 1514.8,2915 1514.8,2694.13 1644.8,2694.13
Bottom Layer:
  region net 5V: 1070,1410.5 1130,1410.5 1130,1380 2075,1380 2075,1300 1130,1300 1130,1181.93 1070,1181.93
  region net RL1_IN: 2439.8,975.2 2530,885 2530,360 2443.62,273.62 2211.38,273.62 2200,285 2200,375 2210,385 2355,385 2415,445 2415,805 2350,870 2030,870 1996.06,903.94 1996.06,954.44 2016.82,975.2
  region net RL1_OUT: 2160,590 2074.8,675.2 2016.82,675.2 1996.06,654.44 1996.06,553.94 2050,500 2050,290 2066.38,273.62 2143.62,273.62 2160,290
  region net RL2_IN: 2010,485 1975,520 1975,825 1824.8,975.2 1780.6,975.2 1759.84,954.44 1759.84,915.16 1885,790 1885,460 1900,445 1900,290 1916.38,273.62 1993.62,273.62 2010,290
  region net RL2_OUT: 1860,651.51 1836.31,675.2 1774.68,675.2 1750,650.52 1750,290 1766.38,273.62 1843.62,273.62 1860,290
  region net RL3_IN: 1600,405 1635,440 1635,800 1523.62,911.38 1523.62,954.44 1544.38,975.2 1584.8,975.2 1725,835 1725,395 1710,380 1710,290 1693.62,273.62 1616.38,273.62 1600,290
  region net RL3_OUT: 1544.46,675.2 1530.2,675.2 1509.06,654.05 1509.06,509.53 1449.06,449.53 1449.06,290 1465.43,273.62 1542.68,273.62 1559.06,290 1559.06,419.06 1610,470 1610,655 1589.8,675.2
  region net RL4_IN: 1300,470 1385,555 1385,815 1287.4,912.6 1287.4,954.44 1308.16,975.2 1349.8,975.2 1480,845 1480,520 1410,450 1410,290 1393.62,273.62 1316.38,273.62 1300,290
  region net RL4_OUT: 1358.27,578.27 1358.27,654.44 1337.51,675.2 1250.2,675.2 1149.06,574.06 1149.06,290 1165.43,273.62 1242.68,273.62 1259.06,290 1259.06,479.06

## Silkscreen, mask and mechanical layers (free items; w line width, h text height)
Mechanical 1:
  circle w0.5: c2263.78,659.45 r59.06
  circle w0.5: c295.28,659.45 r59.06
  circle w0.5: c2263.78,2627.95 r59.06
  circle w0.5: c295.28,2627.95 r59.06
Mechanical 15:
  circle w10: c295.28,659.45 r118.11
  circle w10: c295.28,2627.95 r118.11
  circle w10: c2263.78,2627.95 r118.11
  circle w10: c2263.78,659.45 r118.11
  lines w4: 0,1643.7 2559.06,1643.7 ; 0,1643.7 0,561.02 2559.06,561.02 2559.06,1643.7 ; 0,1643.7 0,2726.38 2559.06,2726.38 2559.06,1643.7
  lines w6: 0,47.24 0,0 ; 98.42,0 0,0 ; 2559.06,0 2559.06,561.02 0,561.02 0,0

## Text inside footprints (layer, text, board x,y; h text height)
U3: Top Overlay "*" at 785,2020 h59.06